# Altium PCB RT_SUPER_C.PCBdoc (part 2 of 3)
Units mil, origin at the board's own origin, x right, y up, seen from the top; angles counter-clockwise.
Board outline 1450 x 1450 mil, 4 copper layers (Top Layer, GND, PWR, Bottom Layer), stack 39.556 mil thick; 166 components, 118 nets, 492 pads, 204 vias.
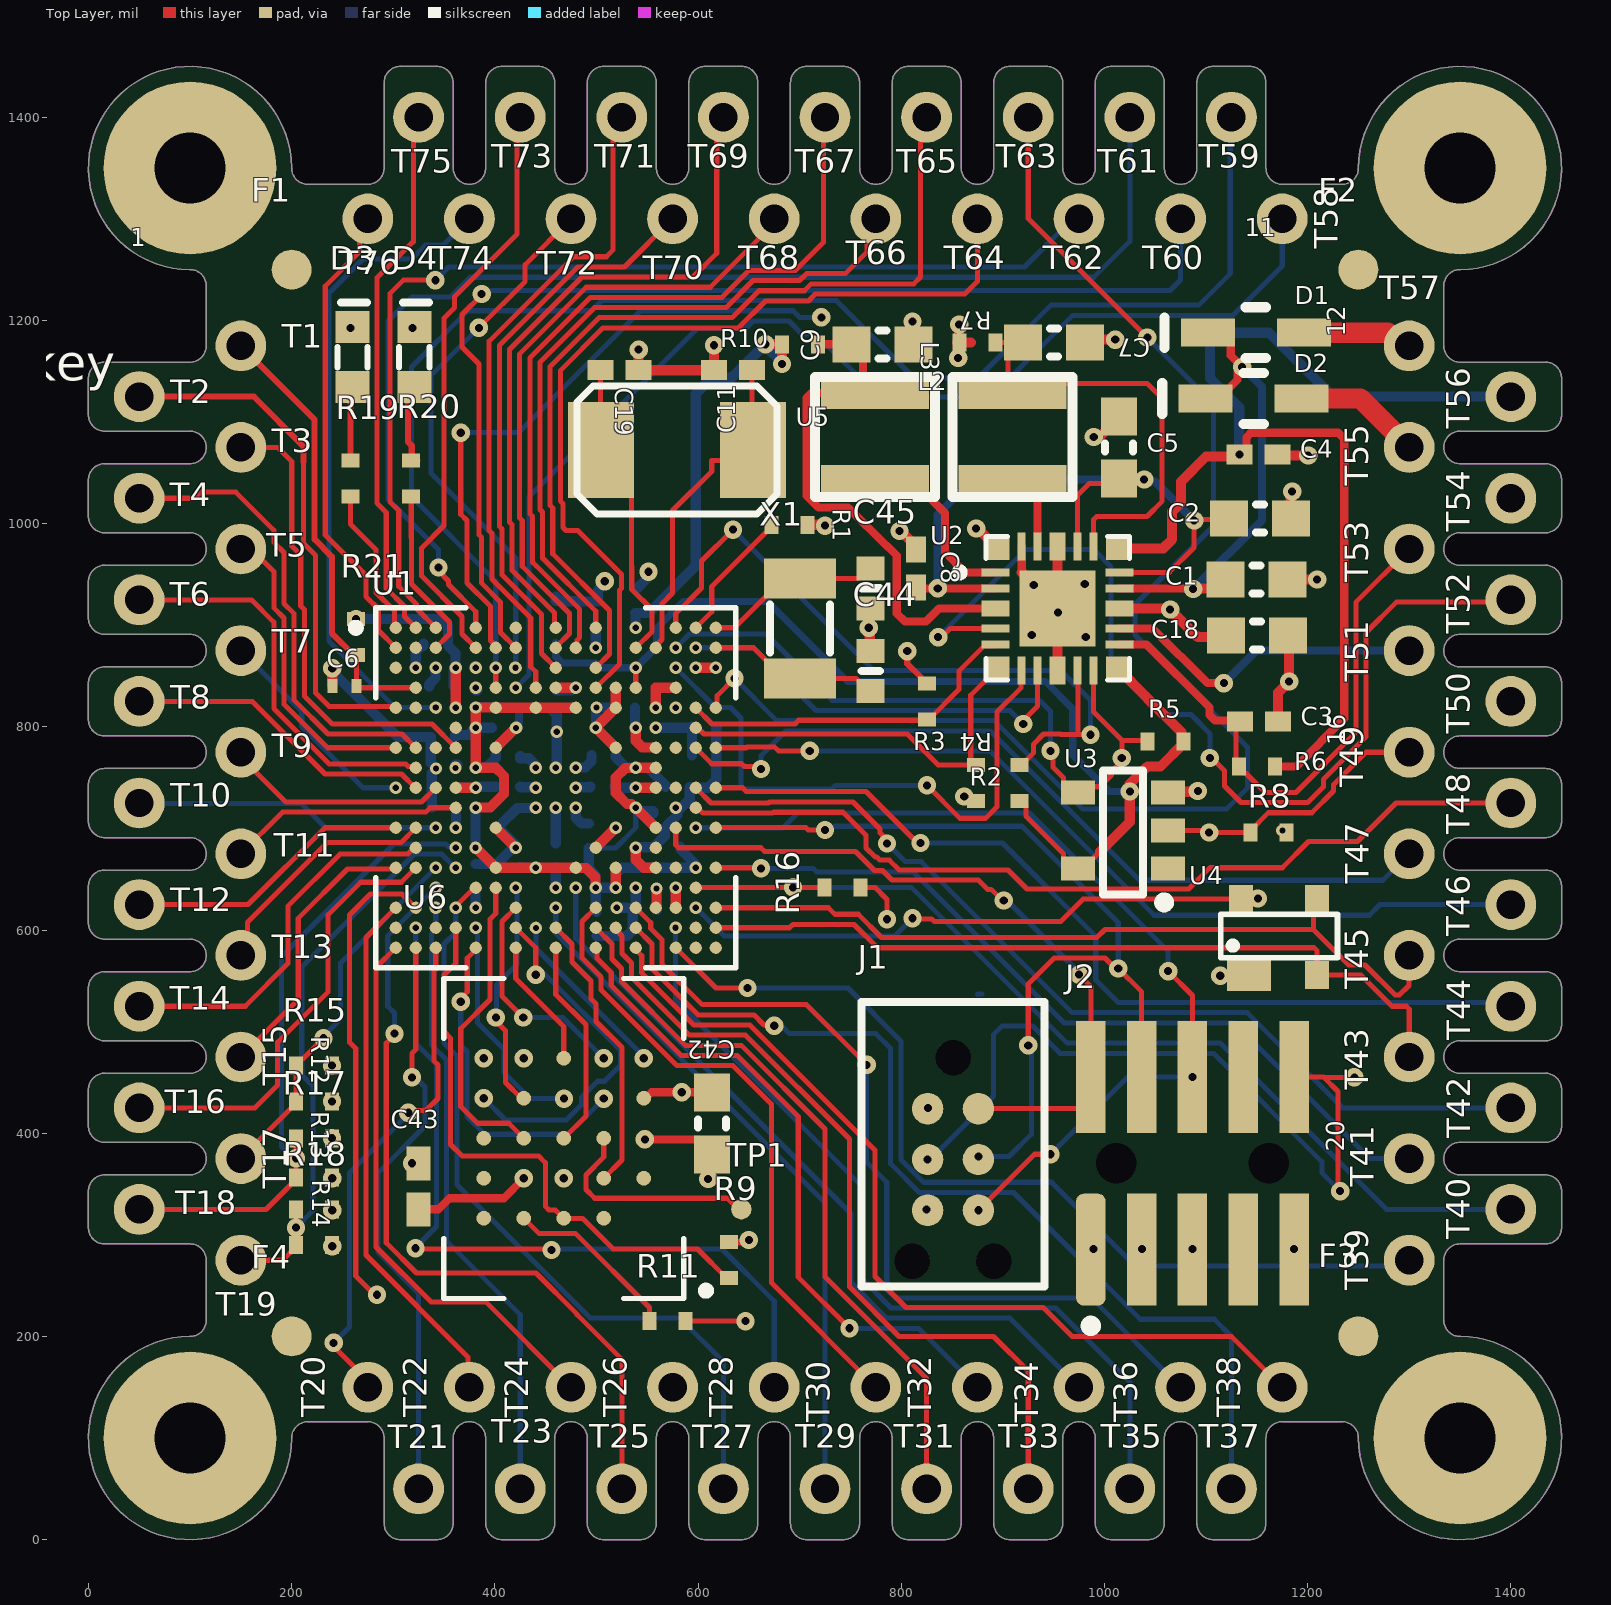
[diagram p0: Top Layer view]

## Via types
v1: diameter 18, hole 8, Top Layer to Bottom Layer, tented both sides, 125 vias
v2: diameter 12, hole 6, Top Layer to Bottom Layer, tented both sides, 79 vias

## Nets (pads, with @x,y where several pads share a name; then routed paths per layer and width w, separated by ;. In a path a pad name is that pad's centre, name@x,y a point inside that pad or via, vN(x,y) a via of type N, cw(c..) or ccw(c..) an arc to the next point about the centre after c; other vN are vias at no path point) (continued)
+1v8: (continued)
  PWR w10: v2(361.57,700.63) 361.19,701.01 361.19,713.81 355,720 331.36,720 303,691.64 303,596 318,581 534.16,581 577.73,624.57 577.73,641.19 v2(578.11,641.57) 578.11,674.11 587,683 618.14,683 624,688.86 624,772.85 v2(578.11,818.74) 578.11,838.43 579.09,839.41 ; v2(361.57,858.11) v2(361.57,818.74) 361.57,792.43 375,779 518.69,779 v2(538.74,799.06) 539,799.31 539,837.18 536.77,839.41 ; v2(538.74,897.48) 504.86,897.48 499.75,892.38 499.75,878.18 v2(499.37,877.8) 499.75,877.41 499.75,862.65 522.99,839.41 536.77,839.41 ; v2(617.48,858.11) v2(597.8,858.11) 597.8,845.27 591.94,839.41 579.09,839.41 ; 536.77,839.41 579.09,839.41
  Bottom Layer w10: v1(263.36,905.98) 348.03,905.98 353.89,900.12 353.89,879.92 361.19,872.62 361.19,858.49 v2(361.57,858.11) 361.57,857.57 359.49,855.48 359.49,840.08 C39.2@359.41,840 ; v2@361.03,700.63 v2(361.57,700.63) 361.92,700.97 361.92,721.08 C40.2@362,721.16 ; v2@499.47,877.89 v2(499.37,877.8) 499.37,899.1 499.45,899.18 C36.2@499.57,899.18 ; C41.2@538,819 538,800.34 538.74,799.6 v2(538.74,799.06) ; C37.2@538,912.06 551.38,912.06 597.8,958.47 597.8,1127.8 613.55,1143.55 633.34,1143.55 v1(666.32,1176.53) 666.32,1174.97 682.62,1158.67 v1(682.62,1157.11) ; C37.2@538.3,912.06 538.38,911.98 538.38,898.35 v2@539,897.74
+1v8_AO: C10.2 R2.2 R5.2 U1.C13 U1.D13 U2.12 U3.5 | length 1114.9
  Top Layer w5: U1.D13@538.74,838.43 v2(538.74,858.11) ; R2.2@916.51,726.88 R2.2@916.38,727.01 918.35,727.01 922.74,722.62 922.74,712.02 959.91,674.85 959.91,669.93 969.22,660.62 U3.5@974.14,660.62 979.06,660.62 995.65,677.2 995.94,677.2
  Top Layer w10: 995.94,677.2 1025,706.27 v1(1025,736.37) 1025,743.78 1042.25,761.02 1055.26,761.02 1077.68,783.44 R5.2@1077.68,785.41 1075.79,787.3 1075.79,794.58 1042.24,828.13 ; U2.12@1013.03,857.56 1041.21,829.38
  Bottom Layer w7: C10.2@460,882.72 460,869 466,863 499.25,863 504.14,858.11 v2(538.74,858.11) 559,878.37 559,896.93 585.33,923.26 668.38,923.26 747.15,844.48 941.92,844.48 968.81,817.59 968.81,772.25 1004.69,736.37 v1(1025,736.37)
+3v3: C12.2 C13.2 C14.2 C15.2 C16.2 C17.2 C18.2 C20.2 C21.2 C22.2 C23.2 C24.2 C25.2 C42.1 C43.1 J1.1 J2.1 R3.2 R4.2 R8.2 R9.2 R12.2 R13.2 R14.2 T50.1 U1.E6 U1.E8 U1.E10 U1.F5 U1.H5 U1.H13 U1.H14 U1.K5 U1.K13 U1.L14 U1.M5 U1.N6 U1.N8 U1.N10 U1.N12 U1.N16 U1.P11 U1.P12 U2.15 U6.B4 U6.D1 U6.E4 | length 1406.1
  Top Layer w6: R9.2@630.28,292.72 647.72,292.72 v1(650,295) ; v1(805.91,874.45) 805.91,862.12 819.46,848.57 819.46,846.61 823.35,842.72 R3.2@825.31,842.72 ; J1.1@826,424.15 826,424.5 v1(826.5,425) ; v1(862,731.5) 864.24,729.26 870.31,729.26 870.91,729.85 R4.2@873.74,727.01
  Top Layer w8: R14.2@239.72,290 239.72,289.07 v1(240.04,288.75) ; R13.2@239.72,356.48 239.72,355.96 v1(240.04,355.63) ; C43.1@325,325.15 344.47,325.15 355.33,336 408.87,336 v1(428.5,355.63) ; U6.D1@546.61,434.37 548.39,434.37 554.32,440.3 v1(583.93,440.3) C42.1@613.54,440.3 ; J2.1@986.67,285.42 987.33,286.09 v1(989.41,286.09)
  Top Layer w10: v2(381,681) U1.M5@381.26,680.94 U1.M5@381.26,680.94 U1.N6@400.94,661.26 v2(440.32,661.26) U1.N10@479.69,661.26 480.07,660.88 490.12,660.88 498.99,652.01 498.99,641.96 v2(499.37,641.57) ; v2(381.26,720.31) 381.64,720.7 395.7,720.7 409,734 409,751.63 400.94,759.68 v2(381.26,759.68) v2(381.26,799.06) v2(381.26,819.12) 400.56,819.12 U1.E6@400.94,818.74 U1.E8@440.32,818.74 U1.E10@479.69,818.74 ; v2(519.06,641.57) U1.N12@519.06,661.26 ; U1.K13@534.51,724 530.06,724 519.06,735 519.06,750.06 528.3,759.3 538.36,759.3 v2(538.74,759.68) U1.H14@558.43,759.68 ; v2(538.74,720.31) U1.L14@558.43,700.63 ; U2.15@1015,916.61 1063.61,916.61 1076.75,903.48 1091.96,888.26 1118.12,888.26 C18.2@1119.81,889.95 ; v2(1175.11,698.02) 1177.08,696.05 R8.2@1179.38,696.05
  Bottom Layer w5: C15.2@492.48,680.76 518.75,680.76 538.74,700.74 v2(538.74,720.31)
  Bottom Layer w10: C16.2@361,790 361,791.81 361.08,791.89 373.55,791.89 380.72,799.06 v2(381.26,799.06) ; v2(381,681) C20.2@381,701 381.08,701.08 381.08,720.13 v2(381.26,720.31) ; v2(381.26,759.68) 381.64,760.07 391.88,760.07 401,769.19 C21.2@401,771 401,772.81 C21.2@400.92,772.89 ; v2(381.26,819.12) 381.64,819.51 400.41,819.51 400.49,819.58 C17.2@400.49,820.12 ; v2(381.26,799.06) C13.2@396.97,799.03 ; C24.2@425,662 425,661.71 425.08,661.63 439.94,661.63 v2(440.32,661.26) ; C15.2@492.48,680.76 492.48,660.68 498.99,654.17 498.99,641.96 v2(499.37,641.57) ; C12.2@500,618 499.37,618.63 v2(499.37,641.57) ; C22.2@519,772 519,770.19 529.12,760.07 538.36,760.07 v2(538.74,759.68) 539.12,759.3 551.39,759.3 567.88,742.81 C25.2@567.88,741 ; v2(538.74,720.31) 539.28,720.31 542.71,716.89 555.8,716.89 555.88,716.81 C23.2@555.88,715 ; C14.2@582.24,681.93 582.24,680.12 597.41,664.94 597.41,661.64 v2(597.8,661.26) 524.91,661.26 519.44,655.78 519.44,641.96 v2(519.06,641.57) v2(499.37,641.57)
  other v1: 239.72,431.39 428.5,473.74 1064.69,915.54
+5vUSB: D2.1 T55.1 U1.R16 U4.4 | length 1214.2
  Top Layer w5: v1(811,611.54) 811.57,610.98 830,610.98 832.59,608.39 957.01,608.39 979.06,630.44 U4.4@1134.5,630.44 1150.44,630.44 v1(1151,631)
  Top Layer w20: D2.1@1194.12,1123.21 1251.79,1123.21 T55.1@1300,1075
  PWR w5: v1(1151,631) 1233.52,713.52 1233.52,1008.52 T55.1@1300,1075
  Bottom Layer w5: v2(597.8,621.89) 597.97,621.89 625.76,594.1 793.56,594.1 v1(811,611.54)
+VBATT: C4.2 R6.2 T56.1 U2.18 | length 1121.9
  Top Layer w8: v1(1132.78,1068.11) 1135.73,1068.11 1139.69,1072.07 1139.69,1084.81 1144.37,1089.49 1230,1089.49 1235.99,1083.5 1235.99,808.04 1188.97,761.01 R6.2@1168.04,761.01
  Top Layer w10: U2.18@1013.03,975.67 1057.89,975.67 1066.66,984.43 1066.66,1011.99 1075.52,1020.85 1075.52,1041.52 1099.98,1065.99 1130.65,1065.99 v1(1132.78,1068.11)
  Bottom Layer w10: v1(1132.78,1068.11) 1132.78,1114.28 1103.8,1143.25 1103.8,1182.08 1109.66,1187.94 1162.06,1187.94 1225,1125 T56.1@1400,1125
+VBATT_BU: C3.2 R6.1 T53.1 U2.13 | length 546.9
  Top Layer w5: R6.1@1129.65,761.99 C3.2@1129.65,805.3 ; R6.1@1132.6,761.01 1132.6,759.04 1136.99,754.65 1138.96,754.65 1158.19,735.42 1188.56,735.42 1247.49,794.35 1247.49,922.49 T53.1@1300,975
  Top Layer w8: U2.13@1015,881.18 1041.52,881.18 1103.39,819.31 1103.39,811.68 1108.79,806.29 C3.2@1129.65,806.29
+VIN: D1.1 T57.1 | length 109.1
  Top Layer w20: D1.1@1196.24,1188 1278.88,1188 1291.88,1175 T57.1@1300,1175